# Altium PCB MEMC_Plug_FFC.PcbDoc
Units mm, origin at the board's own origin, x right, y up, seen from the top; angles counter-clockwise.
Board outline 32 x 31.75 mm, 2 copper layers (Top Layer, Bottom Layer), stack 1.57 mm thick; 7 components, 56 nets, 133 pads, 68 vias.
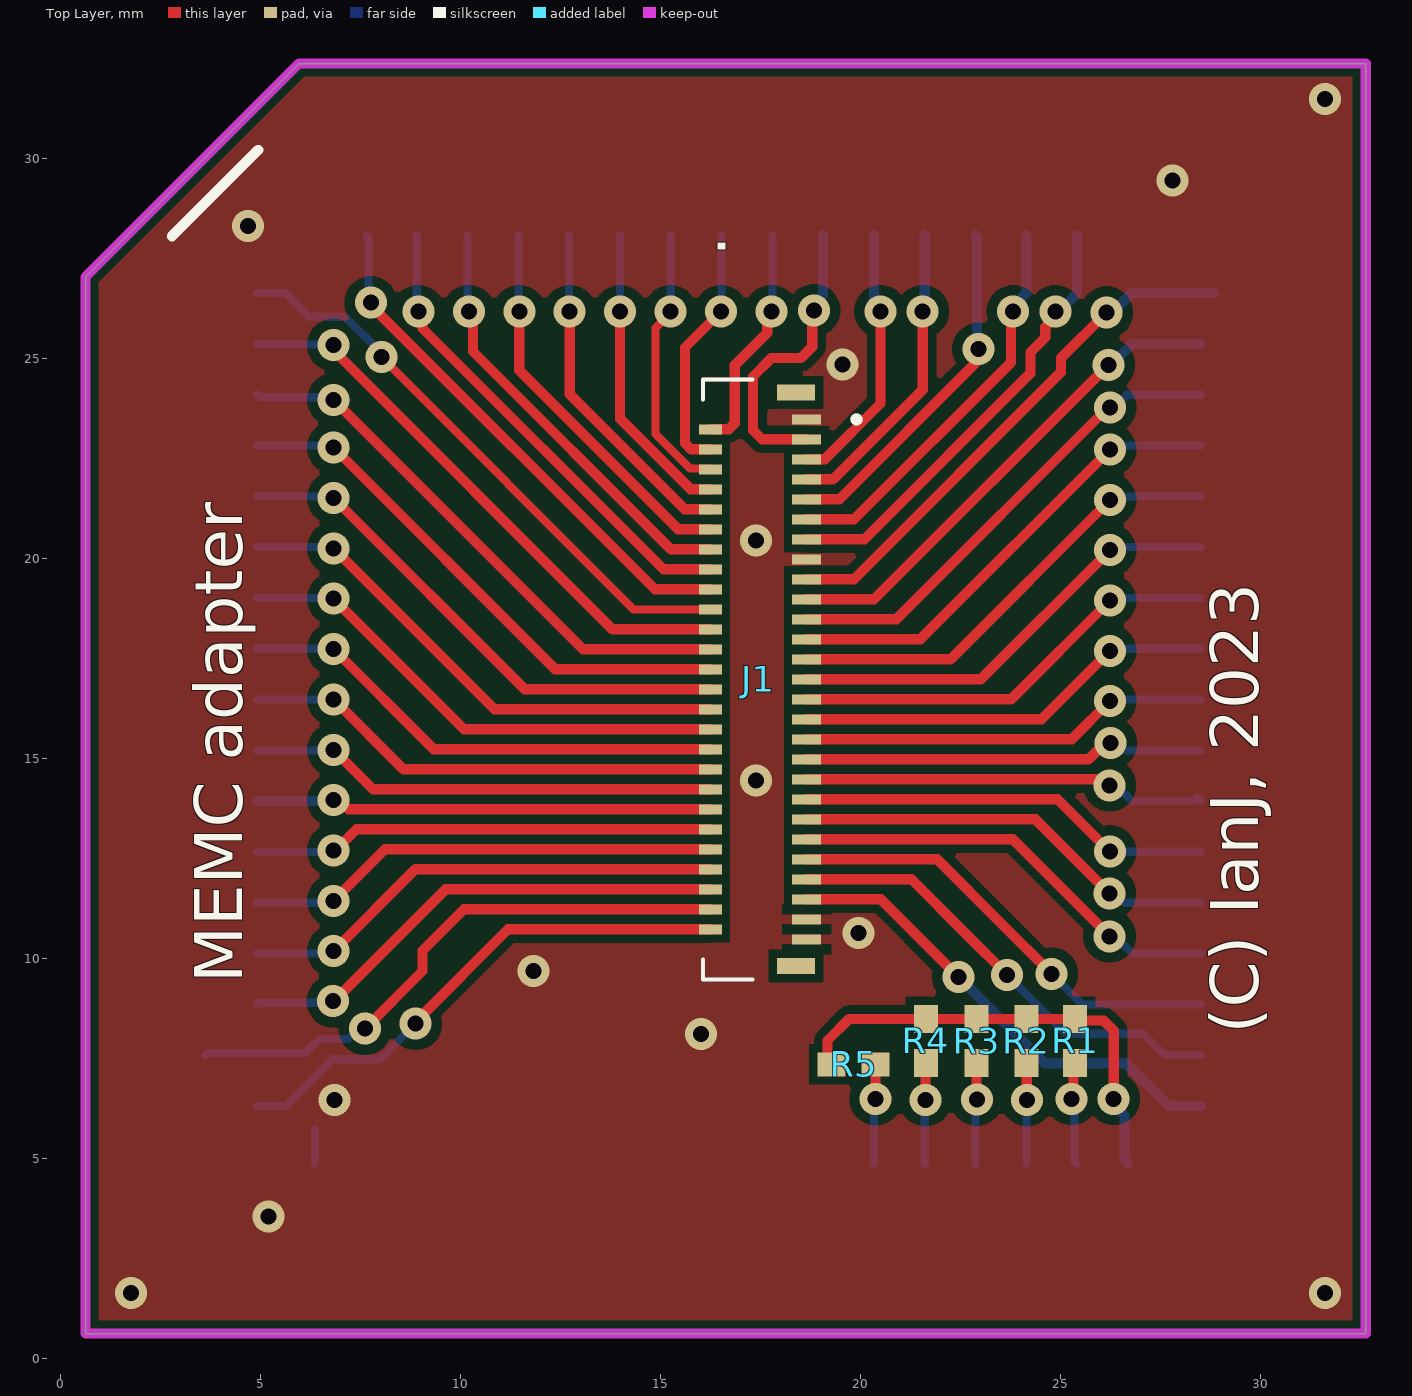
[diagram p0: Top Layer view]
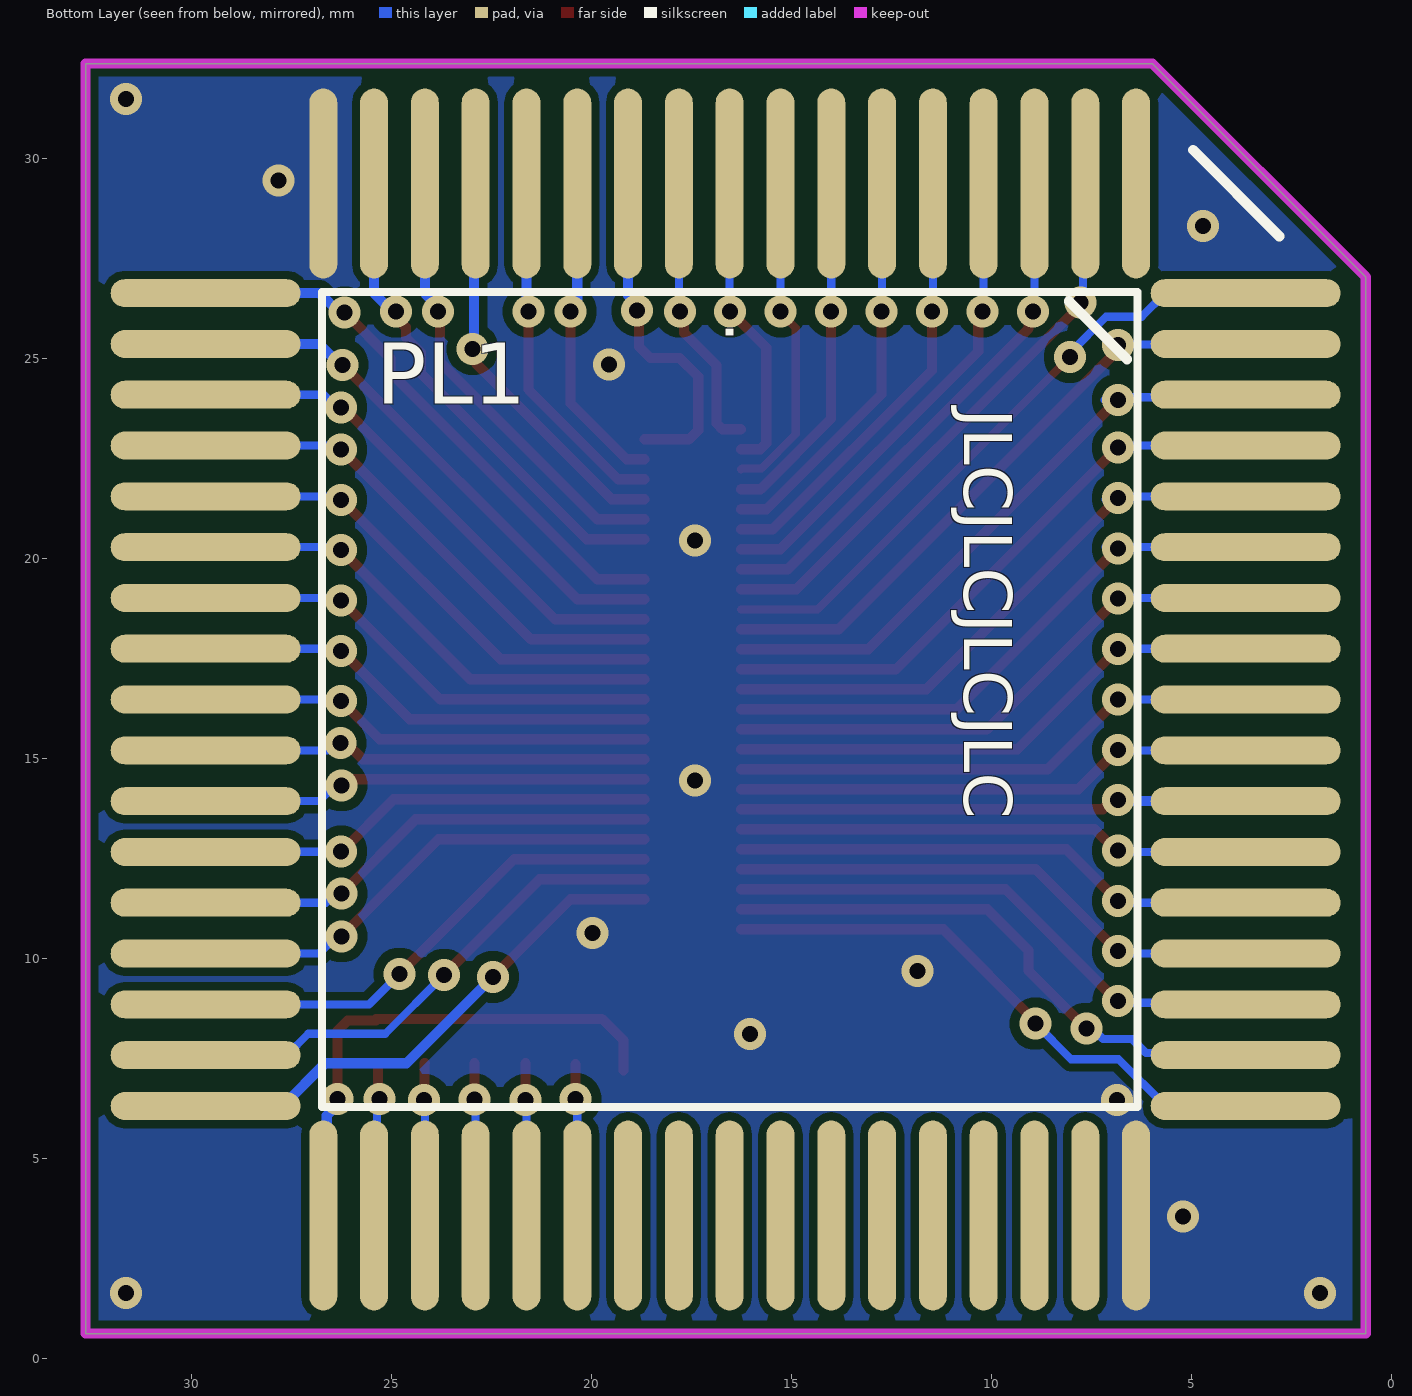
[diagram p1: Bottom Layer view, seen from below]
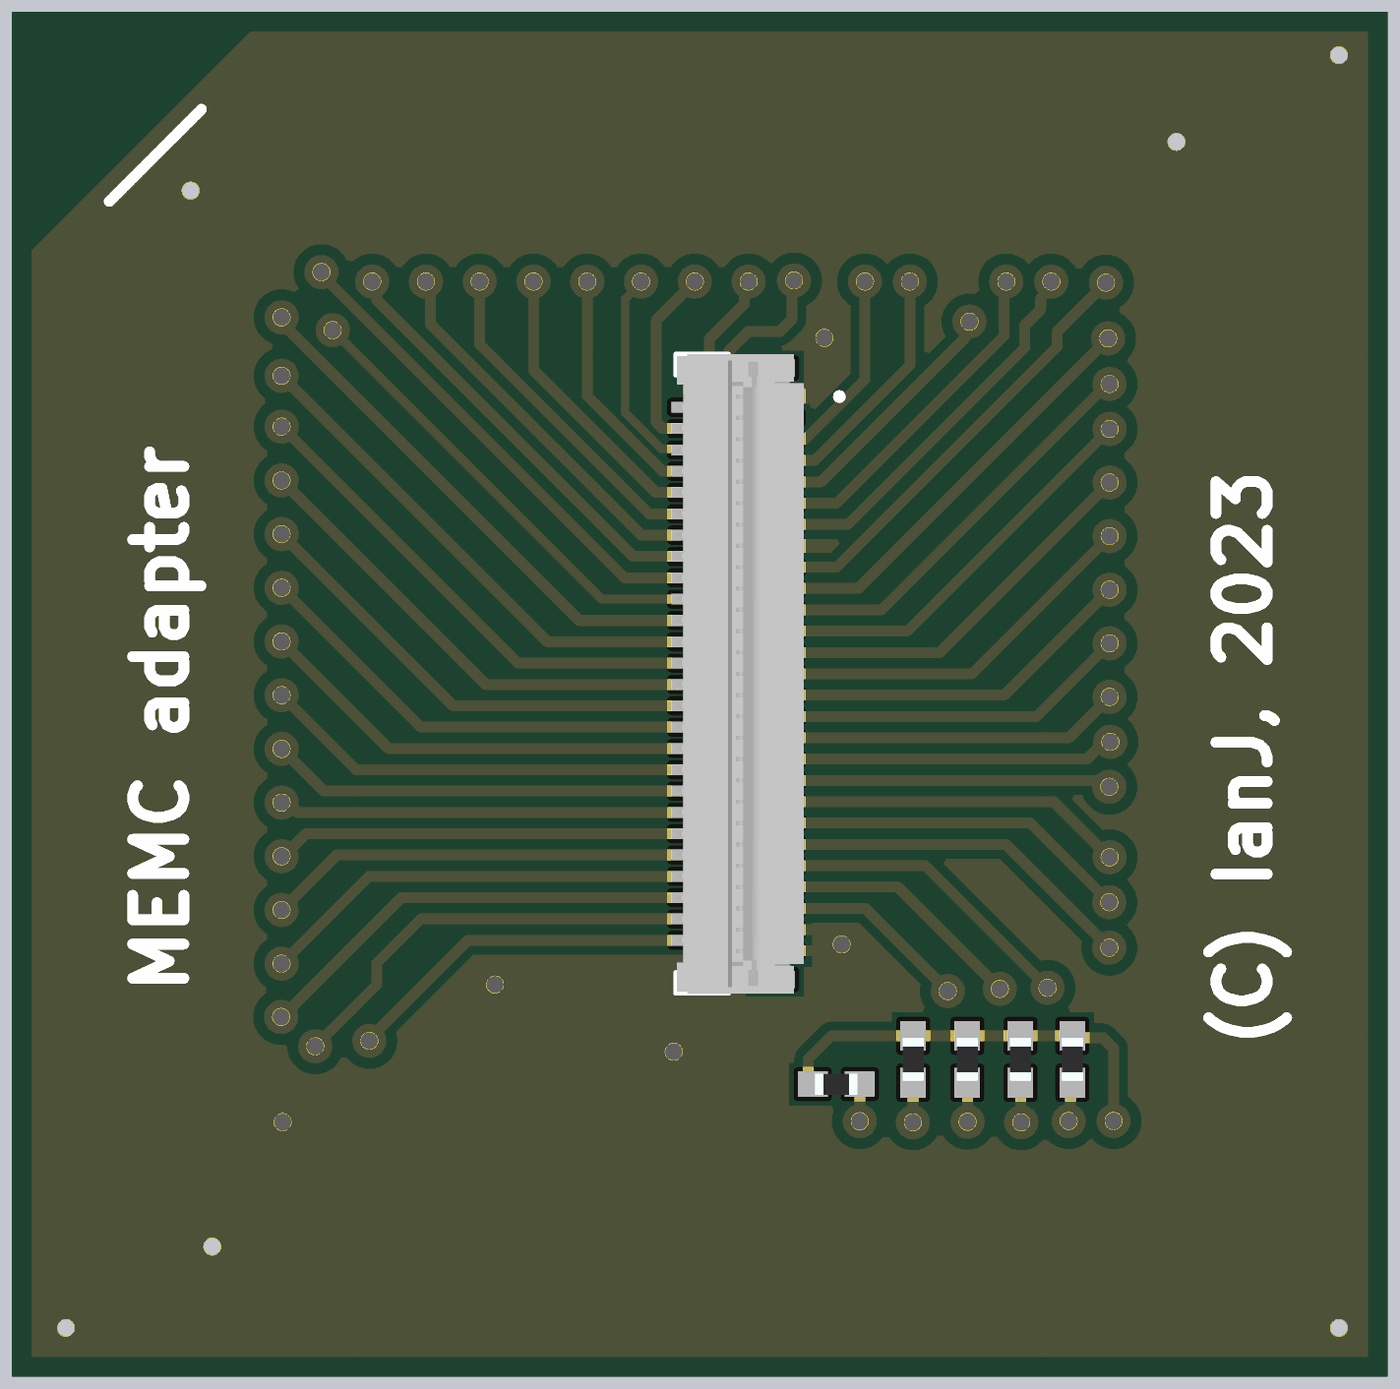
[diagram p2: 3D render of the assembled board from above, using the file's embedded part models]

## Layer stack, top to bottom
Top Solder: solder mask 0.0102, Solder Resist, Dk 3.5
Top Layer: signal copper 0.035
Dielectric 2: prepreg 0.2, PP-006, Dk 4.1
Dielectric 1: dielectric 1.1, FR-4, Dk 4.8
Dielectric 3: prepreg 0.2, PP-006, Dk 4.1
Bottom Layer: signal copper 0.035
Bottom Solder: solder mask 0.0102, Solder Resist, Dk 3.5

## Board outline
0.635,27.051 5.969,32.385 32.639,32.385 32.639,0.635 0.635,0.635

## Design rules (kind name [scope] priority, off if disabled: settings)
Clearance [All] p1: gap=0.203 ignorepadtopadclearanceinfootprint=FALSE except(0: Arc-Hole Track-Hole SMDPad-Hole THPad-Hole Via-Hole Fill-Hole Poly-Hole Region-Hole Text-Hole; 0.127: Arc-Arc Arc-Track Arc-THPad Track-Track Track-THPad; 0.254: Arc-Text Track-Text SMDPad-THPad SMDPad-Text THPad-THPad THPad-Via THPad-Fill THPad-Poly THPad-Region THPad-Text Via-Via Via-Fill Via-Poly Via-Region Via-Text Fill-Text Poly-Text Region-Text Text-Text)
ComponentClearance [All] p1: gap=0.127 collisioncheckmode=3 verticalgap=0.254 showdistances=FALSE
MinimumSolderMaskSliver [All] p1: minsoldermaskwidth=0.025
PolygonConnect [All] p1: connectstyle=Direct reliefconductorwidth=0.254 reliefentries=4 polygonreliefangle="90 Angle" airgapwidth=0.254
RoutingVias [All] p1: holewidth=0.711 width=1.27 viastyle="Through Hole" minholewidth=0.711 minwidth=1.27 maxholewidth=0.711 maxwidth=1.27
SolderMaskExpansion [All] p1: expansion=0.102 istentingtop=FALSE
Width [All] p1: maxlimit=0.254 minlimit=0.127 preferedwidth=0.254 minimp=50.000000 maximp=50.000000 favimp=50.000000
28 further rules are at their usual default settings.

## Components (designator, comment, footprint, x,y, rotation, side; value= is the part's Value field where it differs from the comment)
J1 "502078-5362 FFC" 5020785362 17.561,16.99 r90 top
PL1 "MEMC motherboard plug" MEMC_Plug 16.535,16.484 r0 bottom locked
R1 "10K" RESC1005X40N 25.375,7.95 r270 top
R2 "10K" RESC1005X40N 24.155,7.95 r270 top
R3 "10K" RESC1005X40N 22.911,7.95 r270 top
R4 "10K" RESC1005X40N 21.641,7.95 r270 top
R5 "10K" RESC1005X40N 19.837,7.366 r0 top

## Footprints (in the part's own frame and the unit in brackets; to place one, negate y for a bottom-side part, rotate by r counter-clockwise, add the part's x,y. Pads: shape width x height; smd on the part's side, far side on the other; paste and mask are expansions set on the pad)
5020785362 [mm]
  rect 0.25x0.72 smd: 1(6.5,-1.1) 3(6,-1.1) 5(5.5,-1.1) 7(5,-1.1) 9(4.5,-1.1) 11(4,-1.1) 13(3.5,-1.1) 15(3,-1.1) 17(2.5,-1.1) 19(2,-1.1) 21(1.5,-1.1) 23(1,-1.1) 25(0.5,-1.1) 27(0,-1.1) 29(-0.5,-1.1) 31(-1,-1.1) 33(-1.5,-1.1) 35(-2,-1.1) 37(-2.5,-1.1) 39(-3,-1.1) 41(-3.5,-1.1) 43(-4,-1.1) 45(-4.5,-1.1) 47(-5,-1.1) 49(-5.5,-1.1) 51(-6,-1.1) 53(-6.5,-1.1)
  rect 0.25x0.57 smd: 2(6.25,1.305) 4(5.75,1.305) 6(5.25,1.305) 8(4.75,1.305) 10(4.25,1.305) 12(3.75,1.305) 14(3.25,1.305) 16(2.75,1.305) 18(2.25,1.305) 20(1.75,1.305) 22(1.25,1.305) 24(0.75,1.305) 26(0.25,1.305) 28(-0.25,1.305) 30(-0.75,1.305) 32(-1.25,1.305) 34(-1.75,1.305) 36(-2.25,1.305) 38(-2.75,1.305) 40(-3.25,1.305) 42(-3.75,1.305) 44(-4.25,1.305) 46(-4.75,1.305) 48(-5.25,1.305) 50(-5.75,1.305) 52(-6.25,1.305)
  rect 0.4x0.95 smd: MP1(7.17,-0.835) MP2(-7.17,-0.835)
  silkscreen extent -7.5,-2.4 7.5,1.49, body extent -7.5,-1.52 7.5,1.47, height 1
MEMC_Plug [mm]
  rrect100% 0.7x4.75 smd: 1(0,-12.9) 2(-1.27,-12.9) 3(-2.54,-12.9) 4(-3.81,-12.9) 5(-5.08,-12.9) 6(-6.35,-12.9) 7(-7.62,-12.9) 8(-8.89,-12.9) 9(-10.16,-12.9) 27(-10.16,12.9) 28(-8.89,12.9) 29(-7.62,12.9) 30(-6.35,12.9) 31(-5.08,12.9) 32(-3.81,12.9) 33(-2.54,12.9) 34(-1.27,12.9) 35(0,12.9) 36(1.27,12.9) 37(2.54,12.9) 38(3.81,12.9) 39(5.08,12.9) 40(6.35,12.9) 41(7.62,12.9) 42(8.89,12.9) 43(10.16,12.9) 61(10.16,-12.9) 62(8.89,-12.9) 63(7.62,-12.9) 64(6.35,-12.9) 65(5.08,-12.9) 66(3.81,-12.9) 67(2.54,-12.9) 68(1.27,-12.9)
  rrect100% 4.75x0.7 smd: 10(-12.9,-10.16) 11(-12.9,-8.89) 12(-12.9,-7.62) 13(-12.9,-6.35) 14(-12.9,-5.08) 15(-12.9,-3.81) 16(-12.9,-2.54) 17(-12.9,-1.27) 18(-12.9,0) 19(-12.9,1.27) 20(-12.9,2.54) 21(-12.9,3.81) 22(-12.9,5.08) 23(-12.9,6.35) 24(-12.9,7.62) 25(-12.9,8.89) 26(-12.9,10.16) 44(13.1,10.16) 45(13.1,8.89) 46(13.1,7.62) 47(13.1,6.35) 48(13.1,5.08) 49(13.1,3.81) 50(13.1,2.54) 51(13.1,1.27) 52(13.1,0) 53(13.1,-1.27) 54(13.1,-2.54) 55(13.1,-3.81) 56(13.1,-5.08) 57(13.1,-6.35) 58(13.1,-7.62) 59(13.1,-8.89) 60(13.1,-10.16)
  silkscreen extent -10.19,-10.19 10.19,10.19, body extent -12.57,-12.57 12.57,12.57, height 7.5
RESC1005X40N [mm]
  rect 0.7x0.6 smd: 1(-0.55,0) 2(0.55,0)
  body extent -0.5,-0.25 0.5,0.25, height 0.4

## Part data
J1: library part 502078-5362, "Connector", Manufacturer_Name=Molex, Mouser Part Number=538-502078-5362, Datasheet Link=https://componentsearchengine.com/Datasheets/1/502078-5362.pdf, Height=1.15mm, Manufacturer_Part_Number=502078-5362, Mouser Price/Stock=https://www.mouser.com/Search/Refine.aspx?Keyword=538-502078-5362
PL1: library part MEMC_Plug, "MEMC plug"
R1 R2 R3 R4 R5: library part CRCW040210K0FKEDHP, "Resistor", Manufacturer_Name=Vishay, Mouser Part Number=71-CRCW040210K0FKEDH, Arrow Part Number=CRCW040210K0FKEDHP, Arrow Price/Stock=https://www.arrow.com/en/products/crcw040210k0fkedhp/vishay?region=nac, Datasheet Link=http://www.vishay.com/docs/20035/dcrcwe3.pdf, Height=0.4mm, Manufacturer_Part_Number=CRCW040210K0FKEDHP, Mouser Price/Stock=https://www.mouser.co.uk/ProductDetail/Vishay-Dale/CRCW040210K0FKEDHP?qs=FlFvgi4rxBxmIiaeyFjrkA%3D%3D

## Via types
v1: diameter 0.8, hole 0.4, Top Layer to Bottom Layer, tented both sides, 68 vias

## Nets (pads, with @x,y where several pads share a name; then routed paths per layer and width w, separated by ;. In a path a pad name is that pad's centre, name@x,y a point inside that pad or via, vN(x,y) a via of type N, cw(c..) or ccw(c..) an arc to the next point about the centre after c; other vN are vias at no path point)
A0: J1.52 PL1.26 | length 13.2
  Top Layer w0.254: v1(8.89,8.382) 8.89,8.433 11.197,10.74 J1.52
  Bottom Layer w0.203: PL1.26@4.927,6.324 5.644,6.324 6.813,7.493 8.001,7.493 v1(8.89,8.382)
A1: J1.50 PL1.25 | length 14.4
  Top Layer w0.254: v1(7.62,8.255) 9.061,9.696 9.061,10.204 10.097,11.24 J1.50
  Bottom Layer w0.203: PL1.25 3.69,7.649 6.125,7.649 6.477,8.001 7.205,8.001 7.459,8.255 v1(7.62,8.255)
A2: J1.48 PL1.24 | length 12.5
  Top Layer w0.254: v1(6.821,8.943) 6.842,8.943 9.639,11.74 J1.48
  Bottom Layer w0.203: PL1.24@4.927,8.864 4.967,8.904 6.782,8.904 v1(6.821,8.943)
A3: J1.46 PL1.23 | length 12.4
  Top Layer w0.254: v1(6.833,10.192) 8.88,12.24 J1.46
  Bottom Layer w0.203: PL1.23@4.927,10.134 v1@7.036,10.134
A4: J1.44 PL1.22 | length 12
  Top Layer w0.254: v1(6.833,11.451) 8.121,12.74 J1.44
  Bottom Layer w0.203: PL1.22@4.927,11.404 6.96,11.404 v1@6.985,11.379
A5: J1.42 PL1.21 | length 11.7
  Top Layer w0.254: v1(6.833,12.711) 6.878,12.711 7.408,13.24 J1.42
  Bottom Layer w0.203: PL1.21@4.927,12.674 6.96,12.674 v1@7.01,12.624
A6: J1.40 PL1.20 | length 11.5
  Top Layer w0.254: v1(6.833,13.97) 6.98,13.97 7.21,13.74 J1.40
  Bottom Layer w0.254: PL1.20@4.927,13.944 6.884,13.944 v1@6.909,13.919
A7: J1.38 PL1.19 | length 11.9
  Top Layer w0.254: v1(6.833,15.229) 7.821,14.24 J1.38
  Bottom Layer w0.203: PL1.19@4.927,15.214 6.934,15.214 v1@6.96,15.189
A8: J1.36 PL1.18 | length 12
  Top Layer w0.254: v1(6.833,16.488) 8.581,14.74 J1.36
  Bottom Layer w0.203: PL1.18@4.927,16.484 6.68,16.484 v1@6.731,16.535
A9: J1.34 PL1.17 | length 12.5
  Top Layer w0.254: v1(6.833,17.747) 9.34,15.24 J1.34
  Bottom Layer w0.203: PL1.17@4.927,17.754 6.884,17.754 v1@6.909,17.729
A10: J1.32 PL1.16 | length 12.8
  Top Layer w0.254: v1(6.833,19.006) 10.099,15.74 J1.32
  Bottom Layer w0.203: PL1.16@4.927,19.024 6.96,19.024 v1@6.985,18.999
A11: J1.30 PL1.15 | length 13.3
  Top Layer w0.254: v1(6.833,20.265) 10.858,16.24 J1.30
  Bottom Layer w0.203: PL1.15@4.927,20.294 v1@7.137,20.294
A12: J1.28 PL1.14 | length 13.6
  Top Layer w0.254: v1(6.833,21.524) 11.617,16.74 J1.28
  Bottom Layer w0.203: PL1.14@4.927,21.564 7.061,21.564 v1@7.137,21.488
A13: J1.26 PL1.13 | length 13.9
  Top Layer w0.254: v1(6.833,22.783) 12.376,17.24 J1.26
  Bottom Layer w0.203: PL1.13@4.927,22.834 7.036,22.834 v1@7.087,22.784
A14: J1.24 PL1.12 | length 14.3
  Top Layer w0.254: v1(6.833,23.978) 13.07,17.74 J1.24
  Bottom Layer w0.203: PL1.12@4.927,24.104 4.991,24.041 7.099,24.041 v1@7.163,23.978
A15: J1.22 PL1.11 | length 14.4
  Top Layer w0.254: v1(6.833,25.349) 6.833,25.214 13.806,18.24 J1.22
  Bottom Layer w0.203: PL1.11@4.927,25.374 4.94,25.362 6.82,25.362 v1(6.833,25.349)
A16: J1.20 PL1.10 | length 14.7
  Top Layer w0.203: v1(8.031,25.049) 14.339,18.74 J1.20
  Bottom Layer w0.203: PL1.10@4.927,26.644 5.644,26.644 6.235,26.054 7.125,26.054 8.031,25.148 v1(8.031,25.049)
A17: J1.18 PL1.8 | length 13.2
  Top Layer w0.254: v1(7.766,26.409) 7.766,26.346 14.872,19.24 J1.18
  Bottom Layer w0.203: PL1.8@7.645,28.092 7.706,28.032 7.706,26.47 v1(7.766,26.409)
A18: J1.16 PL1.7 | length 12.1
  Top Layer w0.254: v1(8.957,26.187) 9.061,26.083 9.061,25.762 15.083,19.74 J1.16
  Bottom Layer w0.203: PL1.7@8.915,28.092 8.915,26.508 9.054,26.369 v1@9.054,26.207
A19: J1.14 PL1.6 | length 10.9
  Top Layer w0.254: v1(10.218,26.187) 10.322,26.083 10.322,25.187 15.269,20.24 J1.14
  Bottom Layer w0.203: v1@10.16,26.187 10.185,26.213 PL1.6@10.185,28.092
A20: J1.12 PL1.5 | length 9.8
  Top Layer w0.254: v1(11.478,26.187) 11.478,24.717 15.455,20.74 J1.12
  Bottom Layer w0.203: v1@11.455,26.213 PL1.5@11.455,28.092
A21: J1.10 PL1.4 | length 8.7
  Top Layer w0.254: v1(12.739,26.187) 12.739,24.116 15.613,21.242 16.254,21.242 J1.10
  Bottom Layer w0.203: v1@12.725,26.213 PL1.4@12.725,28.092
A22: J1.8 PL1.3 | length 7.6
  Top Layer w0.254: v1(14,26.187) 14,23.504 15.762,21.742 16.254,21.742 J1.8
  Bottom Layer w0.203: v1@13.945,26.187 13.995,26.238 PL1.3@13.995,28.092
A23: J1.6 PL1.2 | length 6.8
  Top Layer w0.203: v1(15.261,26.187) 15.261,26.146 14.884,25.77 14.884,23.122 15.743,22.263 16.233,22.263 J1.6
  Bottom Layer w0.203: v1@15.265,26.289 PL1.2@15.265,28.092
A24: J1.4 PL1.1 | length 6.2
  Top Layer w0.254: J1.4 15.77,22.74 15.621,22.889 15.621,25.287 v1(16.521,26.187)
  Bottom Layer w0.203: v1@16.535,26.264 PL1.1@16.535,28.092
A25: J1.2 PL1.68 | length 5.7
  Top Layer w0.254: J1.2 16.717,23.24 16.866,23.389 16.866,24.841 17.678,25.653 17.678,26.083 v1(17.782,26.187)
  Bottom Layer w0.203: v1@17.729,26.264 17.805,26.34 PL1.68@17.805,28.092
ABRT: J1.31 PL1.53 | length 10.6
  Top Layer w0.254: J1.31 24.533,15.99 v1(26.247,17.704)
  Bottom Layer w0.203: v1@26.213,17.729 26.238,17.754 PL1.53@28.524,17.754
CLK: J1.3 PL1.67 | length 7.5
  Top Layer w0.254: J1.3 17.548,22.99 17.323,23.216 17.323,24.562 17.78,25.019 18.517,25.019 18.802,25.305 18.802,26.168 v1(18.847,26.213)
  Bottom Layer w0.254: v1(18.847,26.213) 18.847,26.361 19.075,26.589 PL1.67@19.075,28.092
DBE: J1.25 PL1.56 | length 11.5
  Top Layer w0.254: J1.25 22.262,17.49 v1(26.247,21.475)
  Bottom Layer w0.203: v1@26.289,21.59 26.315,21.564 PL1.56@28.524,21.564
FLBK: J1.47 PL1.45 | length 11.7
  Top Layer w0.254: J1.47 21.284,11.99 22.655,10.619 v1(23.673,9.601)
  Bottom Layer w0.203: v1(23.673,9.601) 25.146,8.128 27.071,8.128 27.604,7.594 PL1.45@28.524,7.594
GND: J1.1 J1.15 J1.51 J1.53 PL1.27 PL1.61 | length 0.9
  Bottom Layer w0.203: PL1.27@6.375,4.876 6.375,5.593 PL1.27@6.375,5.728
  other v1: 1.778,1.651 31.623,1.651 5.207,3.556 6.858,6.477 16.027,8.128 11.836,9.703 19.964,10.643 17.402,14.465 17.402,20.46 19.558,24.867 4.699,28.321 27.813,29.464 31.623,31.496
nBW: J1.11 PL1.63 | length 10.1
  Top Layer w0.254: J1.11 18.663,20.992 19.231,20.992 19.849,20.992 23.774,24.917 23.774,26.137 v1(23.825,26.187)
  Bottom Layer w0.254: v1(23.825,26.187) 23.825,26.314 24.155,26.644 PL1.63@24.155,28.092
nCAS0: PL1.39 R4.2 | length 2.5
  Top Layer w0.254: v1(21.634,6.472) 21.637,6.476 21.637,7.397 R4.2
  Bottom Layer w0.203: PL1.39@21.615,4.876 v1@21.615,6.477
nCAS1: PL1.40 R3.2 | length 2.6
  Top Layer w0.254: R3.2 22.914,7.397 22.914,6.488 v1(22.916,6.485)
  Bottom Layer w0.203: PL1.40@22.885,4.876 22.885,6.477 v1@22.911,6.502
nCAS2: PL1.41 R2.2 | length 2.5
  Top Layer w0.254: R2.2 24.165,7.391 24.165,6.482 v1(24.174,6.472)
  Bottom Layer w0.203: PL1.41@24.155,4.876 v1@24.155,6.477
nCAS3: PL1.42 R1.2 | length 2.6
  Top Layer w0.254: v1(25.286,6.502) 25.33,6.547 25.33,7.356 R1.2
  Bottom Layer w0.203: v1(25.286,6.502) 25.356,6.433 25.356,4.946 PL1.42@25.425,4.876
nHSYC: J1.45 PL1.46 | length 11.4
  Top Layer w0.254: J1.45 21.927,12.49 23.548,10.869 v1(24.79,9.627)
  Bottom Layer w0.203: v1(24.79,9.627) 25.553,8.864 PL1.46@28.524,8.864
nIOGT: J1.21 PL1.58 | length 12.2
  Top Layer w0.254: J1.21 20.903,18.49 26.199,23.786 v1(26.247,23.786)
  Bottom Layer w0.203: v1(26.247,23.786) 26.36,23.786 26.679,24.104 PL1.58@28.524,24.104
nIORQ: J1.19 PL1.59 | length 12.5
  Top Layer w0.254: J1.19 20.349,18.99 v1(26.213,24.854)
  Bottom Layer w0.254: v1(26.213,24.854) 26.276,24.854 26.797,25.374 PL1.59@28.524,25.374
nMREQ: J1.27 PL1.55 | length 11.1
  Top Layer w0.254: J1.27 23.019,16.99 v1(26.247,20.218)
  Bottom Layer w0.203: v1@26.34,20.218 26.416,20.294 PL1.55@28.524,20.294
nRAS: PL1.38 R5.2 | length 2.5
  Top Layer w0.254: v1@20.388,6.499 R5.2
  Bottom Layer w0.203: PL1.38@20.345,4.876 20.345,6.477 v1@20.371,6.502
  other v1: 20.389,6.498
nRMCS: J1.17 PL1.60 | length 13.4
  Top Layer w0.254: J1.17 19.846,19.49 25.019,24.663 25.019,25.019 v1(26.162,26.162)
  Bottom Layer w0.254: v1(26.162,26.162) 26.302,26.162 26.784,26.644 PL1.60@28.852,26.644
nRW: J1.13 PL1.62 | length 11.3
  Top Layer w0.254: J1.13 19.584,20.49 20.109,20.49 24.257,24.638 24.257,25.163 24.63,25.536 24.63,25.79 24.879,26.04 v1(24.879,26.187)
  Bottom Layer w0.254: v1(24.879,26.187) 24.968,26.187 25.425,26.644 PL1.62@25.425,28.092
nSDAK: J1.39 PL1.49 | length 10.4
  Top Layer w0.254: J1.39 24.934,13.99 26.237,12.687 v1(26.247,12.687)
  Bottom Layer w0.203: v1(26.247,12.687) 26.253,12.681 28.518,12.681 PL1.49@28.524,12.674
nSDRQ: J1.43 PL1.47 | length 11
  Top Layer w0.254: J1.43 23.815,12.99 v1(26.238,10.566)
  Bottom Layer w0.203: v1(26.238,10.566) 26.371,10.566 26.803,10.134 PL1.47@28.524,10.134
nSIRQ: J1.23 PL1.57 | length 11.8
  Top Layer w0.254: J1.23 21.505,17.99 v1(26.247,22.732)
  Bottom Layer w0.203: v1@26.314,22.86 26.34,22.834 PL1.57@28.524,22.834
nVDAK: J1.37 PL1.50 | length 10.2
  Top Layer w0.254: J1.37 25.94,14.49 26.09,14.34 v1(26.238,14.34)
  Bottom Layer w0.203: v1(26.238,14.34) 26.4,14.34 26.795,13.944 28.334,13.944 28.429,14.039 PL1.50@28.524,13.944
nVDRQ: J1.41 PL1.48 | length 10.7
  Top Layer w0.254: J1.41 24.381,13.49 v1(26.238,11.633)
  Bottom Layer w0.203: v1(26.238,11.633) 26.4,11.633 26.628,11.404 PL1.48@28.524,11.404
nVIDW: J1.35 PL1.51 | length 10.1
  Top Layer w0.254: J1.35 25.712,14.99 26.116,15.394 v1(26.264,15.394)
  Bottom Layer w0.203: v1(26.264,15.394) 26.425,15.394 26.604,15.214 PL1.51@28.524,15.214
phi1: J1.5 PL1.66 | length 6.7
  Top Layer w0.254: J1.5 18.663,22.492 19.115,22.492 20.511,23.888 v1(20.511,26.187)
  Bottom Layer w0.254: PL1.66@20.345,28.092 20.345,26.5 20.511,26.335 v1(20.511,26.187)
phi2: J1.7 PL1.65 | length 7.6
  Top Layer w0.254: J1.7 18.663,21.992 19.325,21.992 21.565,24.232 v1(21.565,26.187)
  Bottom Layer w0.254: v1@21.59,26.289 21.615,26.314 PL1.65@21.615,28.092
REF: J1.9 PL1.64 | length 8.9
  Top Layer w0.254: J1.9 18.663,21.492 19.485,21.492 22.857,24.864 22.857,25.143 v1(22.962,25.248)
  Bottom Layer w0.254: PL1.64@22.885,28.092 22.924,28.054 22.924,25.286 v1(22.962,25.248)
RES: J1.49 PL1.44 | length 12
  Top Layer w0.254: J1.49 20.514,11.49 v1(22.454,9.55)
  Bottom Layer w0.254: v1(22.454,9.55) 24.613,7.391 26.645,7.391 27.712,6.324 PL1.44@28.524,6.324
SEQ: J1.29 PL1.54 | length 10.8
  Top Layer w0.254: J1.29 23.776,16.49 v1(26.247,18.961)
  Bottom Layer w0.203: v1@26.34,19.05 26.365,19.024 PL1.54@28.524,19.024
SPMD: J1.33 PL1.52 | length 10.3
  Top Layer w0.254: J1.33 25.289,15.49 v1(26.247,16.447)
  Bottom Layer w0.203: v1@26.187,16.51 26.213,16.484 PL1.52@28.524,16.484
VCC: PL1.43 R1.1 R2.1 R3.1 R4.1 R5.1 | length 11.7
  Top Layer w0.254: R5.1@19.186,7.214 19.186,7.959 19.727,8.5 R4.1 R3.1 R2.1 R1.1 ; R1.1@25.375,8.458 26.091,8.458 26.34,8.209 v1(26.34,6.502)
  Bottom Layer w0.254: v1(26.34,6.502) 26.34,6.355 26.61,6.084 26.61,4.962 PL1.43@26.695,4.876
pads on no net: J1.MP1 J1.MP2 PL1.9 PL1.28 PL1.29 PL1.30 PL1.31 PL1.32 PL1.33 PL1.34 PL1.35 PL1.36 PL1.37

## Polygon pours and split planes (outlines as drawn)
GND on Bottom Layer "NONET_L-01_P-001" (solid, remove dead copper, pour order 1): 0.635,0.635 32.639,0.635 32.639,32.385 0.635,32.385
GND on Top Layer "NONET_L-01_P-001" (solid, remove dead copper, pour order 0): 0.635,0.635 32.639,0.635 32.639,32.385 0.635,32.385

## Keep-outs
Keep-Out Layer:
  the board outline again, w0.254

## Silkscreen, mask and mechanical layers (free items; w line width, h text height)
Top Overlay:
  lines w0.254: 2.794,28.067 4.953,30.226
  text "." at 16.637,27.559 h1.2 r90
  text "MEMC adapter" at 4.553,9.398 h1.2 r90
  text "(C) IanJ, 2023" at 29.953,8.128 h1.2 r90
Bottom Overlay:
  lines w0.254: 2.794,28.067 4.953,30.226 ; 6.604,24.994 8.052,26.441
  text "." at 16.637,25.4 h1.2 r90
  text "JLCJLCJLCJLC" at 10.668,23.749 h1.2 r90
Shape:
  the board outline again, w0.254